# EAGLE board dimpax (EAGLE 6.2)
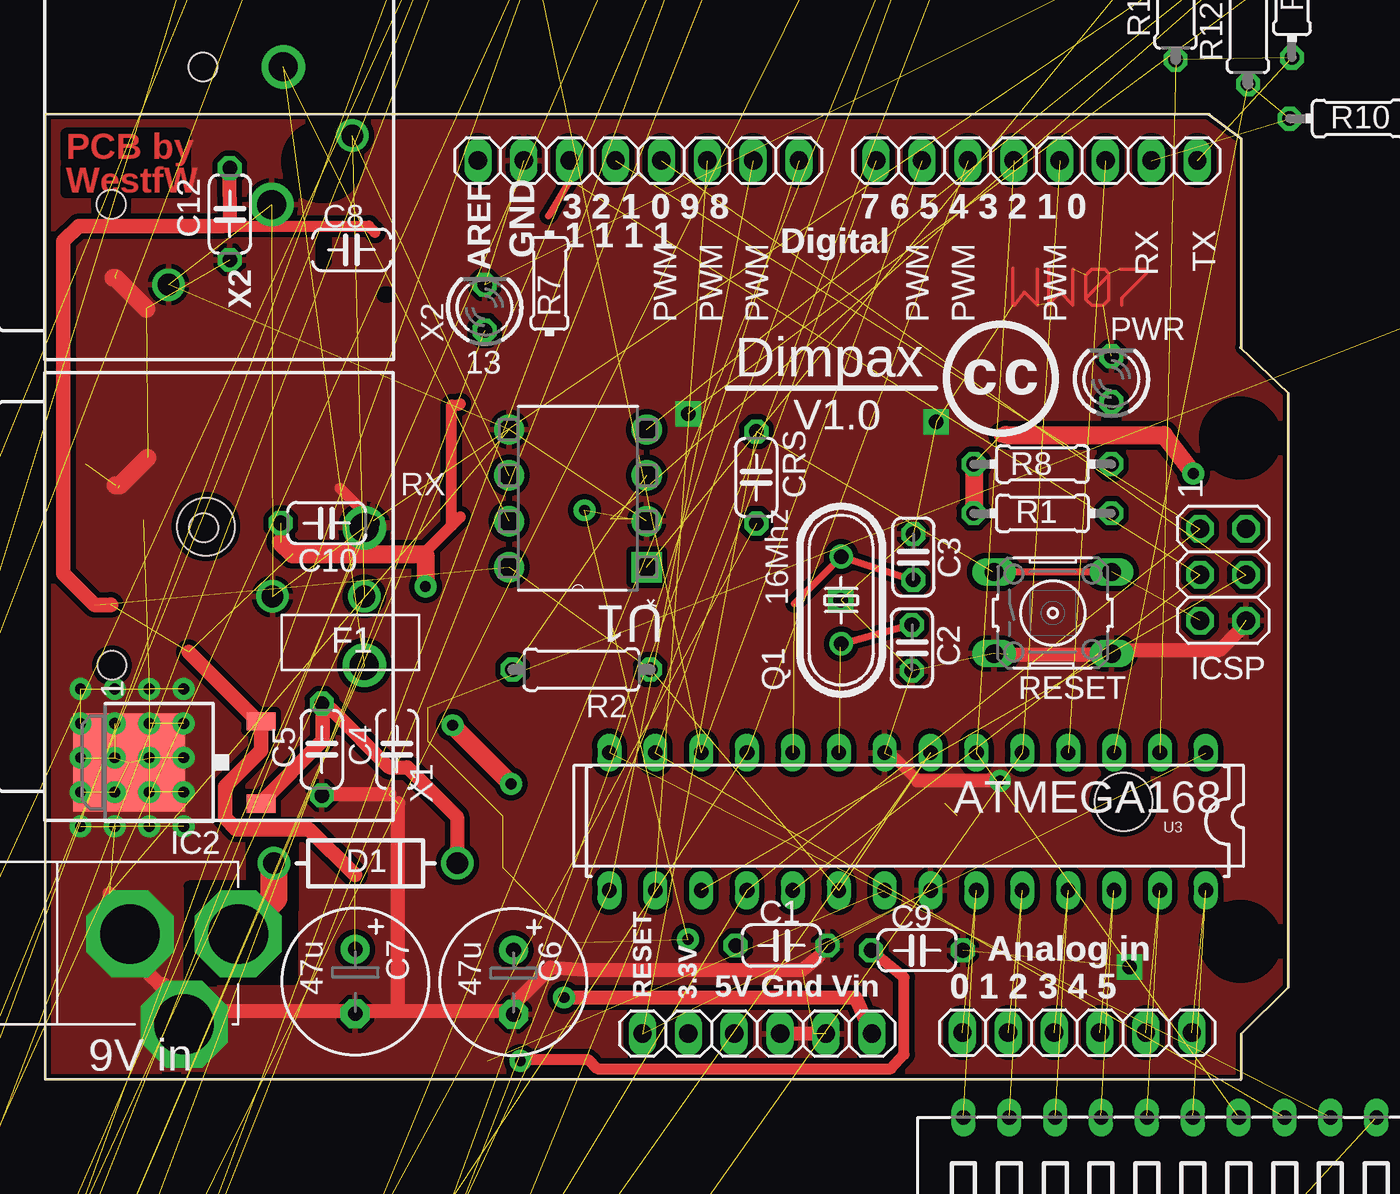
[diagram p0: board, top side]
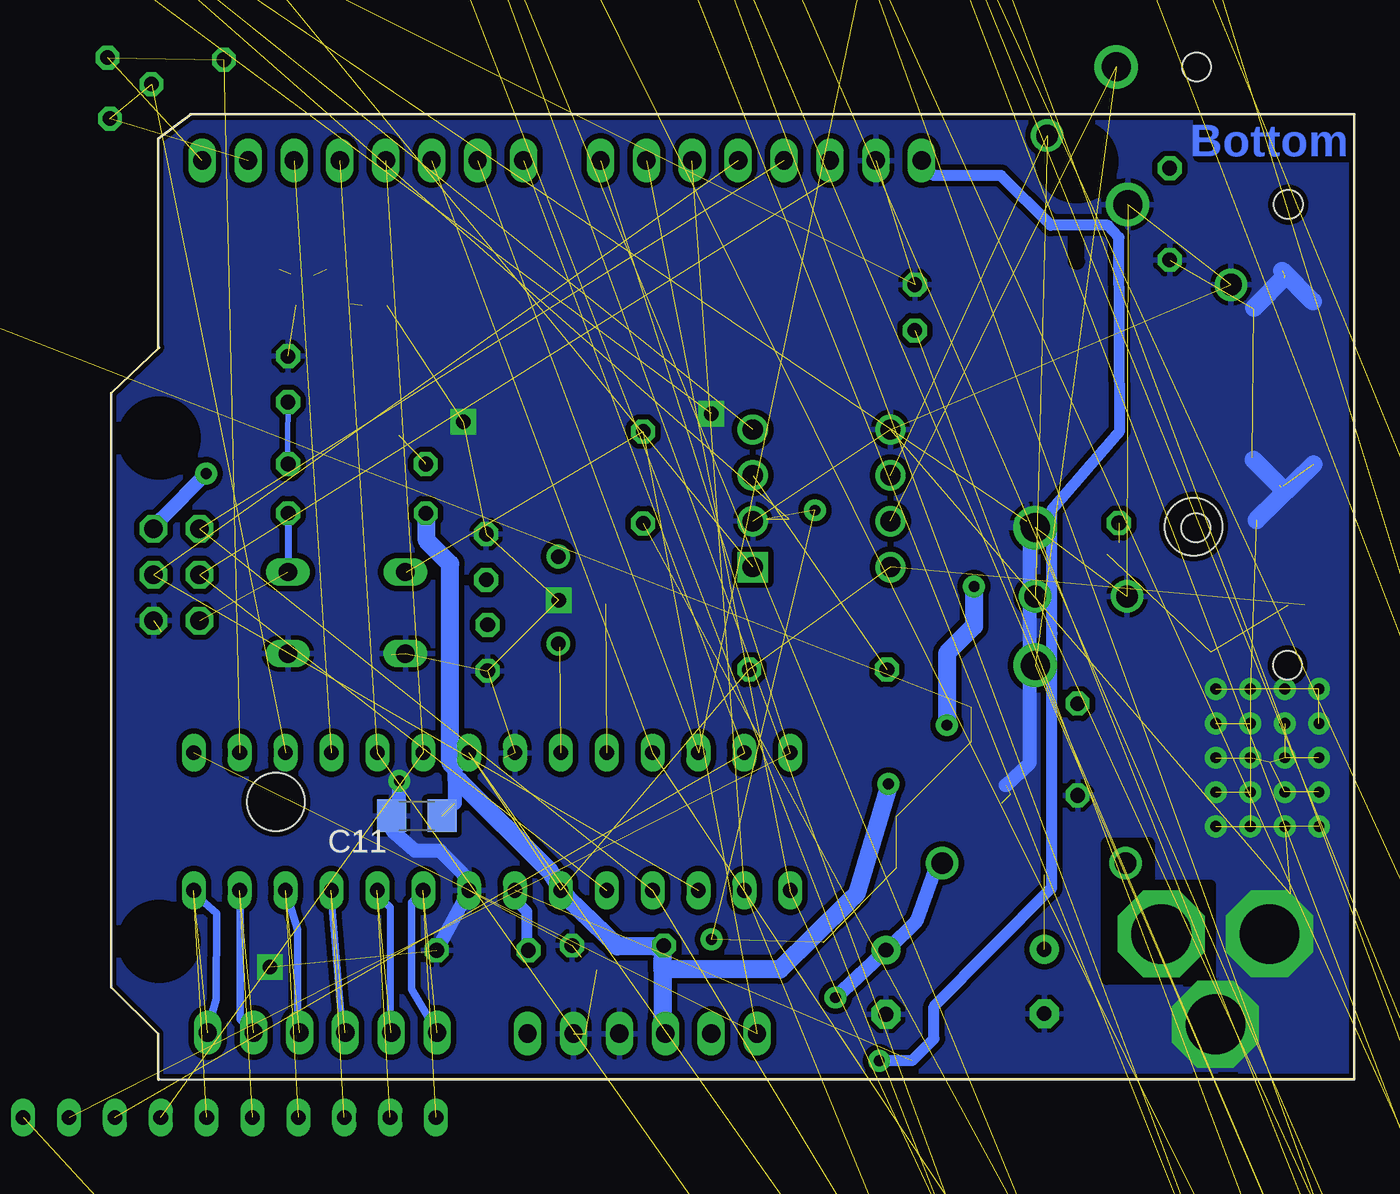
[diagram p1: board, bottom side, seen from below]

Size 68.83 x 53.44 mm. Coordinates in mm from the lower left corner, seen from the top.
Outline: 66.2,0.03 66.22,0.06 66.22,2.55 68.83,5.1
Outline: 66.22,40.54 66.22,52.09 64.39,53.44
Outline: 66.18,0.05 66.2,0 63.63,0.01 0,0.01 0,53.44 64.44,53.44
Outline: 68.83,5.11 68.81,38 66.17,40.54
Copper layers (1*16): Top 0.035mm / dielectric 1.5mm / Bottom 0.035mm
Design rules: minimum track width 10mil, minimum drill 0.6mm, track to track 8mil, track to pad 8mil, pad to pad 8mil, via to via 12mil, smd to smd 8mil, copper to edge 10mil, drill to drill 15mil, minimum pad ring 10mil, minimum via ring 12mil, stop-mask expansion 4mil, vias tented up to drill 0mil, thermal gap 10mil
Net classes: 0 default: width 0.203 mm, clearance 0.203 mm; 1 power: width 0.6 mm, clearance 0.305 mm; 2 finepitch: width 0.203 mm, clearance 0.203 mm
Holes 3.2 mm at 59.7,15.38 59.7,-12.56 8.9,30.62
tRestrict: area 13.5,48.9 to 17.3,52.7; area 64.3,33.6 to 68,37.4; area 64.3,5.8 to 68,9.6; 10 lines
bRestrict: area 13.5,48.9 to 17.3,52.7; area 64.3,33.6 to 68,37.4; area 64.3,5.8 to 68,9.6; 8 lines

## Footprints (pad centres in the part's own frame; a part is rotated, then mirrored left to right if it is on the bottom)
C050-024X044 = drill 0.813 octagon: 1 -2.54,0; 2 2.54,0
C025-024X044 = drill 0.813 octagon: 1 -1.27,0; 2 1.27,0
E3,5-8 = drill 0.813 pad 1.6: + -1.778,0 | drill 0.813 pad 1.6 octagon: - 1.778,0
C1206 = smd 1.6 x 1.8: 1 -1.4,0; 2 1.4,0
DIODE-0.4 = drill 1.2: A 0,0; C 10.16,0
LED3MM = drill 0.813 octagon: A -1.27,0; K 1.27,0
DC-21MM = drill 3.302 pad 4.826 octagon: 1 -5.08,-3.353; 2 -0.076,-6.35; 3 -0.076,-0.356
LITTLEFUSE = drill 0.813 pad 1.778 long: 1 -5.08,0; 2 5.08,0
TO252 = smd 1 x 1.6: 1 -2.28,-4.8; 2 2.28,-4.8 | smd 5.4 x 6.2: 3 0,2.5
2X03 = drill 1.016 octagon: 1 -2.54,-1.27; 2 -2.54,1.27; 3 0,-1.27; 4 0,1.27; 5 2.54,-1.27; 6 2.54,1.27
1X08 = drill 1.016 long: 1 -8.89,0; 2 -6.35,0; 3 -3.81,0; 4 -1.27,0; 5 1.27,0; 6 3.81,0; 7 6.35,0; 8 8.89,0
1X06 = drill 1.016 long: 1 -6.35,0; 2 -3.81,0; 3 -1.27,0; 4 1.27,0; 5 3.81,0; 6 6.35,0
1X02 = drill 1.016 pad 1.88: 1 0,0; 2 2.54,0
DIL06 = drill 0.813 offset: 1 -2.54,-3.81; 2 0,-3.81; 3 2.54,-3.81; 4 2.54,3.81; 5 0,3.81; 6 -2.54,3.81
HC49U-V = drill 0.813: 1 -2.413,0; 2 2.413,0
0204/7 = drill 0.813 octagon: 1 -3.81,0; 2 3.81,0
0207/7 = drill 0.813 octagon: 1 -3.81,0; 2 3.81,0
M1206 = smd 1.6 x 2: 1 -1.4,0; 2 1.4,0
B3F-10XX = drill 1.016 long: 1 -3.251,2.261; 2 3.251,2.261; 3 -3.251,-2.261; 4 3.251,-2.261
DIP10YL = drill 0.813 long: 1 -11.43,-3.81; 2 -8.89,-3.81; 3 -6.35,-3.81; 4 -3.81,-3.81; 5 -1.27,-3.81; 6 1.27,-3.81; 7 3.81,-3.81; 8 6.35,-3.81; 9 8.89,-3.81; 10 11.43,-3.81; 11 11.43,3.81; 12 8.89,3.81; 13 6.35,3.81; 14 3.81,3.81; 15 1.27,3.81; 16 -1.27,3.81; 17 -3.81,3.81; 18 -6.35,3.81; 19 -8.89,3.81; 20 -11.43,3.81
TO220AB = drill 1.118 long: 1 -2.54,-6.35; 2 0,-6.35; 3 2.54,-6.35 | hole 3.302: 0,11.176
DIP254P762X508-8 = drill 1.118 square: 1 -7.62,7.62 | drill 1.118: 2 -7.62,5.08; 3 -7.62,2.54; 4 -7.62,0; 5 0,0; 6 0,2.54; 7 0,5.08; 8 0,7.62
DIL28-3 = drill 0.813 long: 1 -16.51,-3.81; 2 -13.97,-3.81; 3 -11.43,-3.81; 4 -8.89,-3.81; 5 -6.35,-3.81; 6 -3.81,-3.81; 7 -1.27,-3.81; 8 1.27,-3.81; 9 3.81,-3.81; 10 6.35,-3.81; 11 8.89,-3.81; 12 11.43,-3.81; 13 13.97,-3.81; 14 16.51,-3.81; 15 16.51,3.81; 16 13.97,3.81; 17 11.43,3.81; 18 8.89,3.81; 19 6.35,3.81; 20 3.81,3.81; 21 1.27,3.81; 22 -1.27,3.81; 23 -3.81,3.81; 24 -6.35,3.81; 25 -8.89,3.81; 26 -11.43,3.81; 27 -13.97,3.81; 28 -16.51,3.81
NC3MBH = drill 1.6: 1 3.81,0; 2 -3.81,0 | drill 1.2: 3 0,0; G 0,5.08 | hole 1.6: -3.81,13.97; 3.81,8.89
NC3FAH2 = drill 1.6: 1 -3.81,0.635; 2 3.81,0 | drill 1.2: 3 0,-3.815; G -8.25,6.355 | hole 1.6: -3.81,9.525; 3.81,4.445
W237-132 = drill 1.194 long: 1 -2.54,-0.635; 2 2.54,-0.635

## Placement (x,y rotation side)
C1  100n  [C050-024X044]  40.76,7.42 0 top
C2  22pf  [C025-024X044]  47.99,23.91 90 top
C3  22pf  [C025-024X044]  48.06,28.94 270 top
C5  100n  [C050-024X044]  15.32,18.27 90 top
C6  47u  [E3,5-8]  25.93,5.39 270 top
C7  47u  [E3,5-8]  17.16,5.43 270 top
C9  100n  [C050-024X044]  48.26,7.15 0 top
C10  100n  [C050-024X044]  15.58,30.81 180 top
C11  100n  [C1206]  51.9,14.61 0 bottom
C12  100n  [C050-024X044]  10.22,47.92 270 top
CRS  100n  [C050-024X044]  39.37,33.33 90 top
D1  1N4004  [DIODE-0.4]  12.66,11.98 0 top
D2  [LED3MM]  74.36,70.32 270 top  (outside the outline)
D3  [LED3MM]  74.4,64.47 90 top  (outside the outline)
D4  [LED3MM]  24.33,42.74 90 top
DC1  9V in  [DC-21MM]  4.34,8.14 90 top
F1  [LITTLEFUSE]  -133.3,-300.18 0 top  (outside the outline)
IC2  7805DT  [TO252]  7.15,17.56 90 top
ICSP  ICSP  [2X03]  65.2,27.95 270 top
J1  [1X08]  32.84,50.88 180 top
J2  [1X06]  57.12,2.6 0 top
J3  [1X08]  54.89,50.88 180 top
JP1  [1X06]  39.42,2.55 0 top
JP3  [1X02]  -50.06,-133.7 0 top  (outside the outline)
JP6  [1X02]  -50.06,-128.78 0 top  (outside the outline)
OC1  H11A1M  [DIL06]  -56.96,-142.83 0 top  (outside the outline)
OC2  MOC3023M  [DIL06]  -67.76,-142.83 0 top  (outside the outline)
OC3  MOC3023M  [DIL06]  28.7,70.19 0 top  (outside the outline)
OC4  MOC3023M  [DIL06]  -82.08,-234.52 0 top  (outside the outline)
OC5  MOC3023M  [DIL06]  -82.08,-274.75 0 top  (outside the outline)
PWR  [LED3MM]  59.03,38.78 90 top
Q1  16Mhz  [HC49U-V]  44.07,26.54 270 top
R1  10k  [0204/7]  55.21,31.35 180 top
R2  4k7  [0207/7]  29.69,22.7 180 top
R3  1K  [0204/7]  -47.08,-137.71 0 top  (outside the outline)
R4  120R  [M1206]  -49.43,-122.2 0 top  (outside the outline)
R5  180  [0204/7]  -82.99,-152.39 0 top  (outside the outline)
R6  15K  [0204/7]  -82.99,-156.12 0 top  (outside the outline)
R7  15K  [0204/7]  -82.99,-159.85 0 top  (outside the outline)
R8  330  [0204/7]  55.21,34.08 0 top
R9  1K  [0204/7]  69.02,60.39 90 top  (outside the outline)
R10  1K  [0204/7]  72.7,53.21 0 top
R11  1k  [0207/7]  62.58,60.27 90 top  (outside the outline)
R12  1k  [0207/7]  66.59,58.92 90 top
R13  10K  [0204/7]  -82.99,-163.58 0 top  (outside the outline)
R14  180  [0204/7]  -82.99,-203.81 0 top  (outside the outline)
R15  180  [0204/7]  -82.99,-244.04 0 top  (outside the outline)
R16  180  [0204/7]  -82.99,-284.27 0 top  (outside the outline)
RESET  [B3F-10XX]  55.78,25.84 0 top
S1  [DIP10YL]  62.26,-5.91 0 top
T1  BT136  [TO220AB]  15.88,85.75 0 top  (outside the outline)
T2  BT136  [TO220AB]  28.74,85.75 0 top  (outside the outline)
T3  BT136  [TO220AB]  41.63,85.75 0 top  (outside the outline)
T4  BT136  [TO220AB]  54.01,85.75 0 top  (outside the outline)
U1  SN75176BP  [DIP254P762X508-8]  25.68,35.99 180 top
U3  ATMEGA328P_PDIP  [DIL28-3]  47.74,14.29 180 top
U$3  [CC-LOGO]  53.79,39.41 0 top
X1  NC3MBH  [NC3MBH]  17.67,26.75 90 top
X2  NC3FAH2  [NC3FAH2]  13.18,52.26 90 top
X3  [W237-132]  -93.03,-288.8 0 top  (outside the outline)
X4  [W237-132]  -103.35,-288.8 0 top  (outside the outline)
X5  [W237-132]  -113.66,-288.8 0 top  (outside the outline)
X6  [W237-132]  -123.98,-288.8 0 top  (outside the outline)
X7  [W237-132]  -134.29,-288.8 0 top  (outside the outline)

## Library data of the parts
C1-C3 C5-C7 C9-C12 CRS R1-R3 R5-R16 = rcl
D1 = SparkFunEagle-6-6-07
D2-D4 PWR = led
DC1 = powersupply
F1 = fuse; OC_FARNELL: unknown; OC_NEWARK: unknown
IC2 = linear
ICSP J1-J3 JP1 = pinhead
JP3 = SparkFun-Passives
JP6 = SparkFun
OC1 = optocoupler; MPN: H11A1-M; OC_FARNELL: 1021358; OC_NEWARK: 97K1793
OC2-OC5 = optocoupler; MF: FAIRCHILD SEMICONDUCTOR; MPN: MOC3023-M; OC_FARNELL: 1021367; OC_NEWARK: 72K8896
Q1 = crystal
R4 = resistor
RESET = switch-omron
S1 = switch-dil
T1-T4 = triac
U1 = Texas Instruments_By_element14_Batch_1; MPN: SN75176BP; OC_FARNELL: 1106023; OC_NEWARK: 60K6929; PACKAGE: PDIP; SUPPLIER: Texas Instruments
U3 = SparkFun-DigitalIC
U$3 = my-library
X1 X2 = con-neutrik_ag
X3-X7 = con-wago-508; OC_FARNELL: unknown; OC_NEWARK: unknown

## Nets
120V_HOT: F1.1 R5.2 R6.2 R14.2 R15.2 R16.2 T1.2 T2.2 T3.2 T4.2
120V_NEUTRAL: R7.2 X3.1 X4.1 X5.1 X6.1 X7.1
120V_OUT_CH1: T1.1 X4.2
120V_OUT_CH2: T2.1 X5.2
120V_OUT_CH3: T3.1 X6.2
120V_OUT_CH4: T4.1 X7.2
+3.3V: JP1.2
+5V [power]: C1.1 C7.+ C10.2 C11.2 C12.1 IC2.2 ICSP.2 JP1.3 R1.2 R2.1 R8.1 R13.2 U1.8 U3.7 U3.20
A0: J2.1 S1.20 U3.23
A1: J2.2 S1.19 U3.24
A2: J2.3 S1.18 U3.25
A3: J2.4 S1.17 U3.26
A4: J2.5 S1.16 U3.27
A5: J2.6 S1.15 U3.28
AREF: C9.1 J1.8 U3.21
D2: J3.3 U3.4
D3: J3.4 OC1.5 R13.1 U3.5
D4: J3.5 S1.14 U3.6
D7: J3.8 S1.13 U3.13
D8: J1.1 S1.12 U3.14
DMX+: R4.1 U1.6 X1.3 X2.3
DMX-: JP6.2 U1.7 X1.2 X2.2
GND [power]: C1.2 C2.1 C3.1 C5.1 C6.- C7.- C9.2 C10.1 C11.1 C12.2 D2.K D3.K D4.K DC1.1 DC1.3 IC2.3 ICSP.6 J1.7 JP1.4 JP1.5 JP3.2 OC1.4 OC2.2 OC3.2 OC4.2 OC5.2 PWR.K RESET.3 RESET.4 S1.1 S1.2 S1.3 S1.4 S1.5 S1.6 S1.7 S1.8 S1.9 S1.10 U1.2 U1.5 U3.8 U3.22 X1.1 X1.G X2.1 X2.G
MISO: ICSP.1 J1.5 R3.1 S1.11 U3.18
MOSI: ICSP.4 J1.4 U3.17
N$1: R2.2 U1.3
N$2: D4.A R3.2
N$3: PWR.A R8.2
N$4: R12.2 U1.4
N$5: OC2.6 R5.1
N$6: C2.2 Q1.2 U3.9
N$7: CRS.1 JP3.1
N$8 [power]: D1.A DC1.2
N$9: R11.2 U1.1
N$10: OC1.1 R6.1
N$11: OC2.4 T1.3
N$12: OC1.2 R7.1
N$13: OC3.6 R14.1
N$14: OC3.4 T2.3
N$15: OC4.6 R15.1
N$16: OC4.4 T3.3
N$17: OC5.6 R16.1
N$18: OC5.4 T4.3
N$19: F1.2 X3.2
N$22: JP6.1 R4.2
N$31: C3.2 Q1.1 U3.10
N$34: D3.A R10.2
N$36: D2.A R9.2
PWM5: J3.6 OC2.1 U3.11
PWM6: J3.7 OC3.1 U3.12
PWM9: J1.2 OC4.1 U3.15
PWM10: J1.3 OC5.1 U3.16
RESET: CRS.2 ICSP.5 JP1.1 R1.1 RESET.2 U3.1
RXD: J3.1 R9.1 R11.1 U3.2
SCK: ICSP.3 J1.6 U3.19
TXD: J3.2 R10.1 R12.1 U3.3
VIN [power]: C5.2 C6.+ D1.C IC2.1 JP1.6

## Tracks (layer width: path | path; a pad name or v marks a point on that pad's centre or on a via)
120V_HOT  (9 unrouted)
120V_NEUTRAL  (5 unrouted)
120V_OUT_CH1  (1 unrouted)
120V_OUT_CH2  (1 unrouted)
120V_OUT_CH3  (1 unrouted)
120V_OUT_CH4  (1 unrouted)
+5V  (via drill 0.6)  (12 unrouted)
  Top 0.6: 22.98,31.15 23,31.14 | 20.92,29.09 22.98,31.15 | 22.98,31.15 | 22.98,31.15 22.51,30.67 22.51,37.36 22.9,37.34 22.98,37.42 | 18.26,46.9 17.91,47.26 9.82,47.26
  Top 0.762: C12.1 10.24,47.26 9.82,47.26 | 20.92,29.09 21.05,29.05
  Top 0.8: 9.82,47.26 1.86,47.26 1,46.41 1,28.02 2.75,26.27 3.62,26.27 | 51.43,34.17 51.41,34.17 | R1.2 51.43,31.38 | 53.18,35.68 53.17,35.67 52.92,35.67 | 3.62,26.27 3.64,26.31 3.66,26.27 3.62,26.27 | 7.95,23.67 11.78,19.84 IC2.2 11.95,18.22 9.97,16.23 9.97,14.49 10.56,13.85 14.61,13.85 17.17,11.34
  Top 1: 13.04,29.75 13.7,29.09 20.92,29.09 | v63.55,33.55 61.93,35.68 53.18,35.68 | 21.05,29.05 v21.05,27.3 | v22.55,19.62 v25.8,16.37 | 51.43,31.38 51.43,34.17
  Bottom 0.762: v63.55,33.55 66.05,31.05 ICSP.2 | 38.3,3.55 JP1.3 | 49.8,16.55 49.8,17.3 49.55,17.55 | 49.8,16.55 49.8,15.3 | 49.55,16.55 49.8,16.55 | v25.8,16.37 25.76,16.28
  Bottom 0.8: 51.35,31.3 R1.2
  Bottom 1: 38.3,6.1 38.3,3.55 | 38.3,6.1 38.3,6.55 C1.1 38.76,7.37 40.8,7.37 43.55,10.05 44.55,11.55 49.55,16.55 | 49.8,17.3 50.05,17.55 50.05,28.55 51.35,29.85 51.35,31.3 | v21.05,27.3 21.05,25.11 22.55,23.61 v22.55,19.62 | 25.76,16.28 27.57,10.27 28.01,9.84 31.79,6.1 38.3,6.1
A0  (2 unrouted)
A1  (2 unrouted)
A2  (2 unrouted)
A3  (2 unrouted)
A4  (2 unrouted)
A5  (2 unrouted)
AREF  (via drill 0.6)  (1 unrouted)
  Top 0.4: v26.3,1.05 26.3,1.14 26.36,1.2 26.43,1.12
  Top 0.6: C9.1 47.54,5.65 47.54,1.39 46.83,0.6 30.56,0.6 30.04,1.12 26.43,1.12
  Bottom 0.6: 46.3,9.8 45.8,9.3 45.8,7.8 C9.1 | 16.75,10.6 16.77,10.57 | 16.75,10.6 16.75,23.49 16.73,24.7 16.73,31.57 12.98,35.91 13.02,46.64 13.64,47.3 16.81,47.3 19.56,50.05 23.3,50.05 J1.8 | v26.3,1.05 24.48,1.05 23.26,2.27 23.26,4.05 16.79,10.6 | 16.79,10.6 | 16.79,10.6 16.75,10.6
D2  (1 unrouted)
D3  (3 unrouted)
D4  (2 unrouted)
D7  (2 unrouted)
D8  (2 unrouted)
DMX+  (3 unrouted)
DMX-  (3 unrouted)
GND  (via drill 0.6, 0.8)  (75 unrouted)
  Top 0.2: 53.57,44.94 53.57,42.87 53.65,42.87 54.21,43.59 54.92,42.87 54.92,44.86 | 55.56,42.95 55.56,44.94 | 55.56,42.95 55.56,42.87 | 55.56,42.95 56.19,43.59 | 56.19,43.59 | 56.19,43.59 56.9,42.87 56.9,44.86 | 59.52,44.86 60.95,44.86 60.95,44.62 | 60.95,44.62 | 60.95,44.62 59.6,43.27 59.6,42.87 | 57.62,43.19 57.62,44.54 57.94,44.86 58.65,44.86 58.89,44.62 58.89,44.54 | 58.89,44.54 58.89,43.19 58.57,42.87 57.94,42.87 57.62,43.19 | 57.62,43.19 57.62,43.27 58.89,44.54
  Top 0.6: C10.1 18.12,30.89 18.14,30.91 16.31,32.74 | 48.3,16.55 47.05,17.8
  Top 0.762: 3.55,10.3 DC1.3 5.8,5.8 6.3,5.3 6.55,5.3 DC1.1 10.05,3.8 16.55,3.8 C7.- 17.8,3.8 19.55,3.8 | 19.05,15.8 15.8,15.8 C5.1 | 19.55,3.8 25.3,3.8 C6.- 26.19,4.44 28,6.2 27.96,6.2 29.92,6.07 41.92,6.07 42.8,6.8 | 19.55,3.8 19.55,15.3 | v52.87,16.55 48.3,16.55 | 42.55,2.55 41.3,2.55 JP1.4 | 53.3,23.55 57.8,23.55 RESET.4 59.8,23.8 65.05,23.8 66.05,24.8
  Top 1: 3.78,44.38 3.9,44.38 5.61,42.68 | 3.9,32.9 4.14,32.9 5.66,34.42
  Bottom 0.762: v52.87,16.55 52.87,15.14 C11.1 53.26,13.78 51.99,12.66 50.61,12.66 49.57,11.62 arc38 U3.22 C9.2 | 19.3,16.3 17.97,17.55 17.97,30.3 C10.1
  Bottom 1: 3.84,44.44 5.55,42.74 | 4.04,32.78 5.57,34.31 | 2.29,43.07 4,44.78 | 2.25,34.07 5.43,30.97
  other vias: 35.6,36.86 49.33,36.43 60.04,6.23 44.05,26.55 1.95,14.01 3.86,14.01 5.76,14.01 7.67,14.01 7.67,21.63 5.76,21.63 3.86,21.63 1.95,21.63 1.95,19.72 3.86,19.72 5.76,19.72 7.67,19.72 1.95,17.82 3.86,17.82 5.76,17.82 7.67,17.82 1.95,15.92 3.86,15.92 5.76,15.92 7.67,15.92
  pour Bottom (isolate 0.305): -0.98,74.16 76.94,74.36 76.54,-17.93 -1.42,-17.89 -1.14,53.84
  pour Top (isolate 0.305): -6.34,75.67 78.69,75.79 78.45,-20.03 -5.94,-19.99
  pour Bottom (isolate 0.4, rank 5, no thermals): -1.89,11.63 -1.89,-1.2 13.2,-1.2 13.2,11.65 -1.87,11.65
  pour Top (isolate 0.4, rank 5, no thermals): -1.08,11.35 -1.08,-0.77 11.32,-0.77 11.32,11.35
  pour Top (isolate 0.4, rank 6, no thermals): 0.69,22.26 7.03,22.26 8.94,20.36 8.94,14.01 8.3,13.38 0.69,13.38
MISO  (4 unrouted)
MOSI  (2 unrouted)
N$1  (1 unrouted)
N$2  (1 unrouted)
N$3
  Bottom 0.305: R8.2 59.01,34.14 59.05,35.3 PWR.A
N$4  (1 unrouted)
N$5  (1 unrouted)
N$6  (1 unrouted)
  Top 0.4: 44,23.96 44.09,24.05 44.07,24.07 Q1.2 47.94,25.2 C2.2
N$7  (1 unrouted)
N$8
  Top 1.5: D1.A 12.67,12.03 | D1.A | DC1.2 12.67,10.05 D1.A
N$9  (1 unrouted)
N$10  (1 unrouted)
N$11  (1 unrouted)
N$12  (1 unrouted)
N$13  (1 unrouted)
N$14  (1 unrouted)
N$15  (1 unrouted)
N$16  (1 unrouted)
N$17  (1 unrouted)
N$18  (1 unrouted)
N$19  (1 unrouted)
N$20
  Bottom 0.406: 51.67,10.32 52.18,9.81 52.18,5.01 50.72,2.55 50.88,2.55 50.72,2.66 50.88,2.58
N$21
  Bottom 0.4: 53.38,9.53 53.38,2.47
  Bottom 0.406: 54.21,10.36 53.38,9.53
N$22  (1 unrouted)
N$23
  Bottom 0.4: 56.67,10.32 55.99,2.47
N$24
  Bottom 0.406: 59.17,10.44 58.49,8.3 58.49,2.43 58.57,2.35
N$25
  Bottom 0.406: 61.67,10.44 61.67,3.34 60.79,2.47 60.83,2.47 60.87,2.51 61.07,2.51 61.15,2.43 61.15,2.51
N$26
  Bottom 0.406: 64.33,10.4 62.98,9.21 63.02,4.45 63.53,2.58 63.45,2.58
N$31  (1 unrouted)
  Top 0.4: 41.46,26.34 Q1.1 48.06,27.66 C3.2
N$34  (1 unrouted)
N$36  (via drill 0.6)  (15 unrouted)
  other vias: 35.59,7.76 29.85,31.52
PWM5  (2 unrouted)
PWM6  (2 unrouted)
PWM9  (2 unrouted)
PWM10  (2 unrouted)
RESET  (4 unrouted)
  Top 0.4: 59.05,28.1 RESET.2 52.46,28.1 52.46,28.25
  Bottom 0.4: R1.1 59.01,31.35 59.01,28.1 RESET.2
RXD  (3 unrouted)
SCK  (2 unrouted)
  Top 0.4: 27.86,47.81 29.05,49.8 J1.6
TXD  (3 unrouted)
VIN  (via drill 0.6)
  Top 0.762: v28.73,4.55 44.86,4.55 45.3,3.55 JP1.6 | C5.2 15.8,20.55 19.05,17.3 20.05,17.3 22.8,14.55 22.8,12.8 D1.C
  Top 0.8: IC2.1 11.95,15.36 15.37,18.77 15.37,20.97 15.32,20.93 C5.2
  Bottom 0.762: D1.C 23.11,11.93 24.25,8.77 25.83,7.2 25.83,7.19 25.79,7.16 C6.+ 25.84,7.24 v28.73,4.55

## Text on the board
Top: PCB by | WestfW
Bottom: Bottom
tPlace: RESET | 3.3V
tNames: 3 2 1 0 9 8 | 7 6 5 4 3 2 1 0 | RX | TX | GND | 1 1 1 1 | Digital | AREF | PWM | PWM | PWM | PWM | PWM | PWM | 13 | Dimpax | V1.0 | 1 | F1 | Analog in | 5V Gnd Vin | 0 1 2 3 4 5
Edit History: 20070917 WestfW: Move (CC) symbol, use silk_gen to get 5mil widths | 20070917 WestfW: Manual route some, autoroute rest. Fiddle. | 20070917 WestfW: Now V1.16. Change components to TH. | 20070911 WestfW: Now V1.15. Move tracks slightly for shielding | 20070900 Daniel: Schematic and initial placement
_tsilk: R10 | R9 | C12 | C8 | R12 | 3 2 1 0 9 8 | 7 6 5 4 3 2 1 0 | RX | TX | GND | 1 1 1 1 | Digital | R11 | X2 | AREF | R7 | PWM | PWM | PWM | PWM | PWM | PWM | PWR | 13 | Dimpax | c | c | V1.0 | R8 | RX | 16Mhz | CRS | 1 | R1 | C10 | C3 | F1 | Q1 | ICSP | C2 | RESET | 1 | C4 | C5 | ATMEGA168 | IC2 | D1 | C1 | C9 | 47u | C7 | 47u | C6 | Analog in | RESET | 3.3V | 5V Gnd Vin | 0 1 2 3 4 5 | 9V in